# Altium PCB Nixie_Control.PcbDoc
Units mm, origin at the board's own origin, x right, y up, seen from the top; angles counter-clockwise.
Board outline 160 x 45 mm, 4 copper layers (Power, Signal 1, Signal 2, GND), stack 0.603 mm thick; 26 components, 73 nets, 202 pads, 21 vias.
Unrouted connection lines stored in the file: 16.
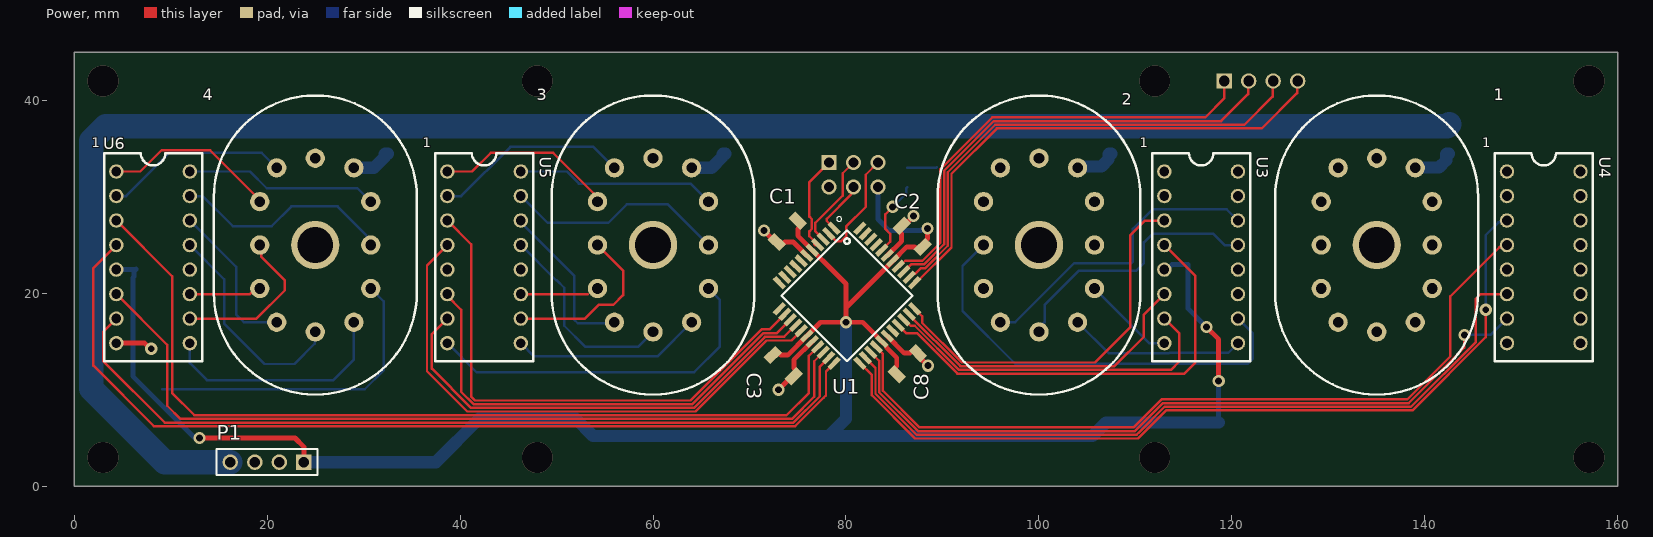
[diagram p0: Power view]
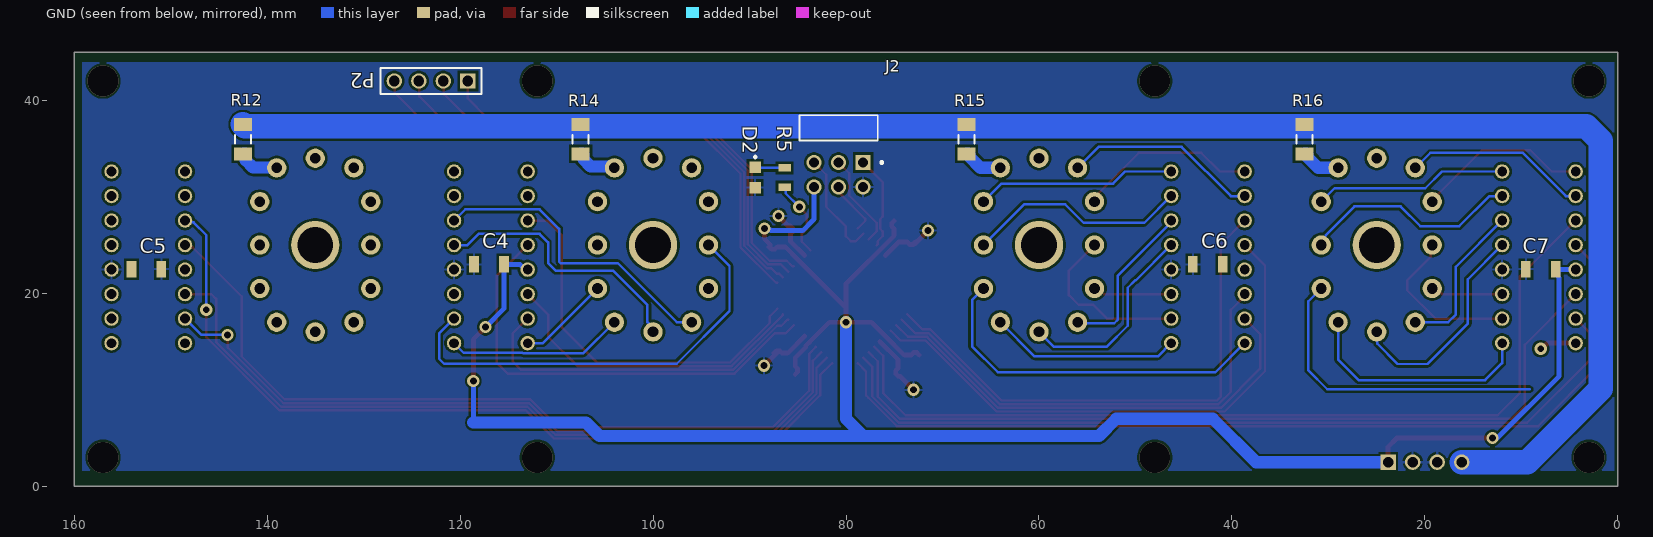
[diagram p1: GND view, seen from below]
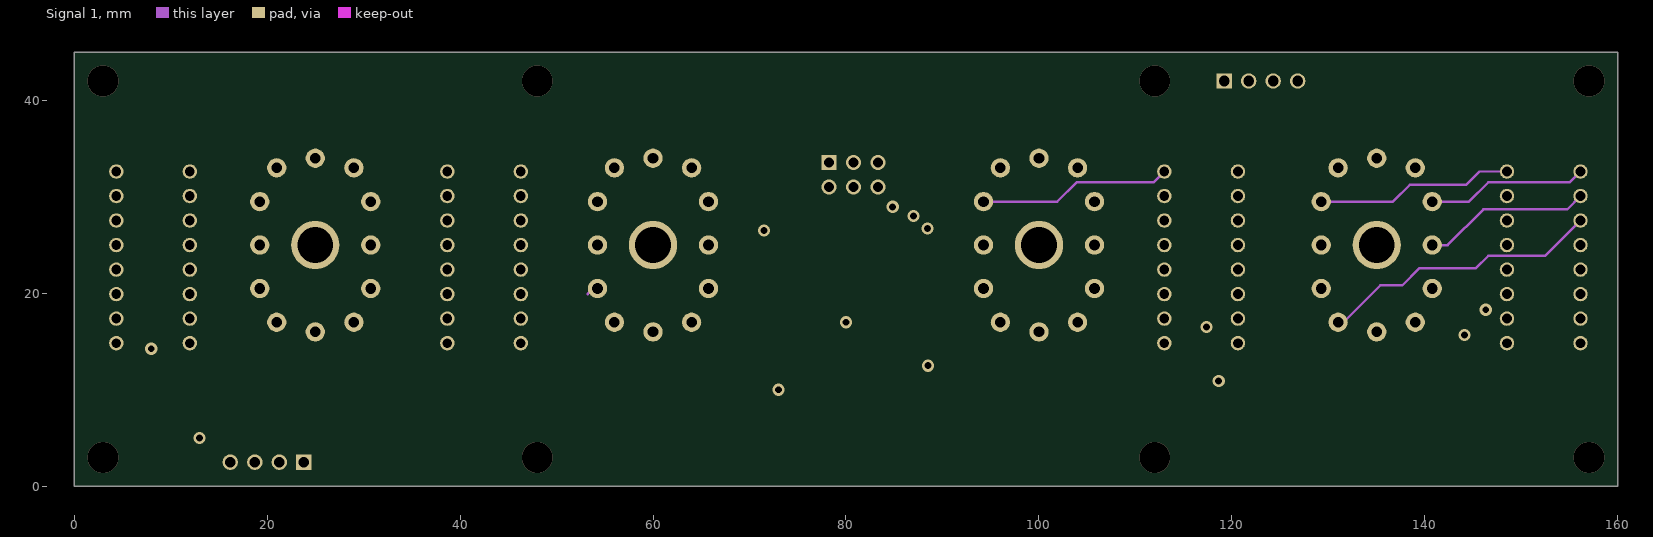
[diagram p2: Signal 1]
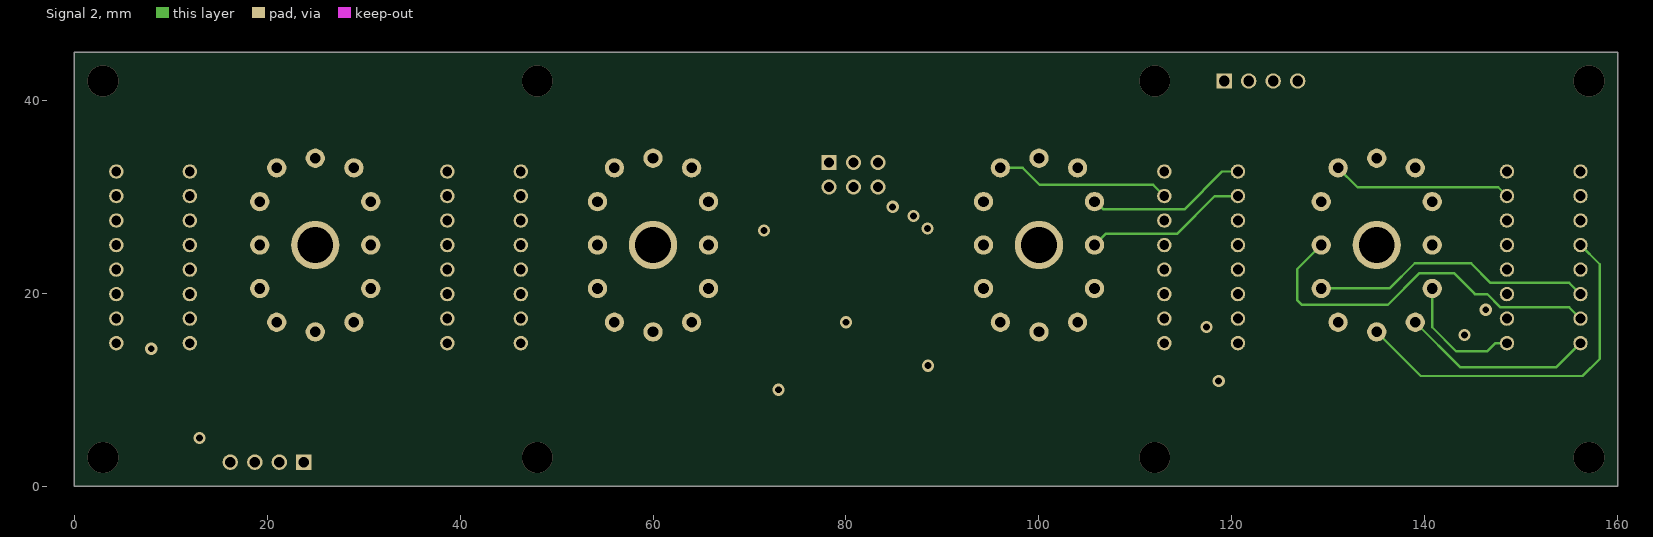
[diagram p3: Signal 2]
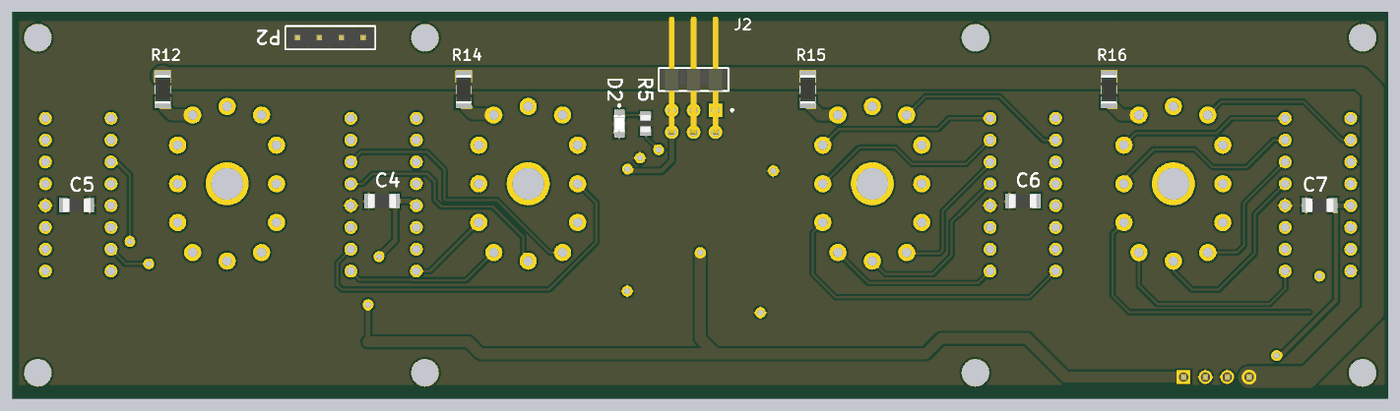
[diagram p4: 3D render of the assembled board from below, using the file's embedded part models]

## Layer stack, top to bottom
Top Solder: solder mask 0.0102, Solder Resist, Dk 3.5
Power: signal copper 0.0356
Dielectric 2: prepreg 0.0711, PP-006, Dk 4.1
Signal 1: signal copper 0.035
Dielectric 1: dielectric 0.32, FR-4, Dk 4.8
Signal 2: signal copper 0.035
Dielectric 3: prepreg 0.0711, PP-006, Dk 4.1
GND: signal copper 0.0356
Bottom Solder: solder mask 0.0102, Solder Resist, Dk 3.5

## Board outline
0,0 160,0 160,45 0,45

## Design rules (kind name [scope] priority, off if disabled: settings)
Clearance [All] p1: gap=0.254 ignorepadtopadclearanceinfootprint=FALSE except(0: Arc-Hole Track-Hole SMDPad-Hole THPad-Hole Via-Hole Fill-Hole Poly-Hole Region-Hole Text-Hole; 0.127: Arc-Arc Arc-Track Track-Track SMDPad-SMDPad; 0.2: Arc-SMDPad Arc-THPad Track-SMDPad Track-THPad; 0.5: THPad-THPad)
Height [All] p1: minheight=0 maxheight=50 prefheight=12.7
HoleSize [All] p1: absolutevalues=TRUE maxlimit=6.3 minlimit=0.2 maxpercent=80.000 minpercent=20.000
PolygonConnect [All] p1: connectstyle=Relief reliefconductorwidth=0.254 reliefentries=4 polygonreliefangle="90 Angle" airgapwidth=0.254
RoutingVias [All] p1: holewidth=0.711 width=1.27 viastyle="Through Hole" minholewidth=0.711 minwidth=1.27 maxholewidth=0.711 maxwidth=1.27
SolderMaskExpansion [All] p1: expansion=0.05 istentingtop=FALSE
Width [All] p1: maxlimit=2.54 minlimit=0.254 preferedwidth=0.254
28 further rules are at their usual default settings.

## Classes and differential pairs
component class ATMega1284p: C1 C2 C3 C8 D2 P2 R5 U1
component class IN_12A: 1 2 3 4 C4 C5 C6 C7 R12 R14 R15 R16 U3 U4 U5 U6
component class Connectors: J2 P1

## Components (designator, comment, footprint, x,y, rotation, side; value= is the part's Value field where it differs from the comment)
1 "IN-12A" IN-12A 135,25 r0 top locked
2 "IN-12A" IN-12A 100,25 r0 top locked
3 "IN-12A" IN-12A 60,25 r0 top locked
4 "IN-12A" IN-12A 25,25 r0 top locked
C1 "Capacitor - 0.1uF - 1206" FOOTPRINT-1206-GEN 73.914,26.416 r45 top value=0.1uF
C2 "Capacitor - 0.1uF - 1206" FOOTPRINT-1206-GEN 86.868,25.908 r315 top value=0.1uF
C3 "Capacitor - 0.1uF - 1206" FOOTPRINT-1206-GEN 73.5,12.5 r135 top value=0.1uF
C4 "Capacitor - 0.1uF - 1206" FOOTPRINT-1206-GEN 117,23 r180 bottom value=0.1uF
C5 "Capacitor - 0.1uF - 1206" FOOTPRINT-1206-GEN 152.5,22.5 r0 bottom value=0.1uF
C6 "Capacitor - 0.1uF - 1206" FOOTPRINT-1206-GEN 42.5,23 r180 bottom value=0.1uF
C7 "Capacitor - 0.1uF - 1206" FOOTPRINT-1206-GEN 8,22.5 r180 bottom value=0.1uF
C8 "Capacitor - 0.1uF - 1206" FOOTPRINT-1206-GEN 86.36,12.7 r225 top value=0.1uF
D2 "LGR971-KN-1" FOOTPRINT-OSRAM-CHIPLED-0805-1A2K 89.408,32.004 r270 bottom
J2 "M20-9950345" FP-M20-9950345-MFG 80.772,37.084 r0 bottom
P1 "61300411121" 61300411121 20,2.5 r180 top
P2 "61300411121" 61300411121 123,42 r0 bottom locked
R5 "RMCF0805FT1K20" FOOTPRINT-0805-GEN 86.36,32.004 r270 bottom value=1.2k
R12 "Resistor 80k +/-1% 1206 250 mW" RESC3216X60X45ML15T20 142.5,35.975 r90 bottom value=80k
R14 "Resistor 80k +/-1% 1206 250 mW" RESC3216X60X45ML15T20 107.5,35.975 r90 bottom value=80k
R15 "Resistor 80k +/-1% 1206 250 mW" RESC3216X60X45ML15T20 67.5,35.975 r90 bottom value=80k
R16 "Resistor 80k +/-1% 1206 250 mW" RESC3216X60X45ML15T20 32.5,35.975 r90 bottom value=80k
U1 "ATMega-1284P" QFP80P1200X1200X120-44N 80.104,19.744 r315 top locked
U3 "K155ID1" Socket_DIP_16 113,32.62 r0 top
U4 "K155ID1" Socket_DIP_16 148.5,32.62 r0 top
U5 "K155ID1" Socket_DIP_16 38.686,32.62 r0 top
U6 "K155ID1" Socket_DIP_16 4.38,32.62 r0 top

## Footprints (in the part's own frame and the unit in brackets; to place one, negate y for a bottom-side part, rotate by r counter-clockwise, add the part's x,y. Pads: shape width x height; smd on the part's side, far side on the other; paste and mask are expansions set on the pad)
61300411121 [mm] "Pin Header, pitch 2.54 mm, THT, Vertical, single row, 4p"
  rect 1.6x1.6 hole 1.1: 1(-3.81,0)
  round 1.6 hole 1.1: 2(-1.27,0) 3(1.27,0) 4(3.81,0)
  silkscreen extent -5.23,-1.35 5.23,1.35, body extent -5.08,-1.27 5.08,1.27, height 8.57
FOOTPRINT-0805-GEN [mm] "1/8 Watt"
  rect 0.8x1.3 smd: 1(-1,0) 2(1,0)
  body extent -1,-0.6 1,0.6, height 0.71
FOOTPRINT-1206-GEN [mm] "1/4 Watt"
  rect 1x1.7 smd: 1(-1.55,0) 2(1.55,0)
  body extent -1.6,-0.8 1.6,0.8, height 0.71
FOOTPRINT-OSRAM-CHIPLED-0805-1A2K [mm] "Rectangle with Flat Top 1.30mm x 1.25mm"
  rect 1.2x1.2 smd: 1(-1.05,0) 2(1.05,0)
  silkscreen extent -2.1,0 -2.1,0, body extent -1.01,-0.62 0.99,0.63, height 0.8
FP-M20-9950345-MFG [mm]
  rect 1.57x1.57 hole 1.02 paste-1000 mask+0: 1(-2.54,3.53)
  round 1.57 hole 1.02 paste-1000 mask+0: 2(-2.54,6.07) 3(0,3.53) 4(0,6.07) 5(2.54,3.53) 6(2.54,6.07)
  silkscreen extent -4.61,-1.37 4.06,3.65, body extent -3.81,-7.37 3.81,6.39, height 5.28
IN-12A [mm]
  round 2 hole 1.1: 1(4,8) 2(5.75,4.5) 3(5.75,0) 4(5.75,-4.5) 5(4,-8) 6(0,-9) 7(-4,-8) 8(-5.75,-4.5) 9(-5.75,0) 10(-5.75,4.5) 11(-4,8) 12(0,9)
  round 5 hole 3.7: ""(0,0)
  silkscreen extent -10.51,-15.49 10.51,15.49, body extent -10,-15.24 10,15.24, height 28
QFP80P1200X1200X120-44N [mm]
  rect 1.5x0.5 smd: 1(-5.9,4) 2(-5.9,3.2) 3(-5.9,2.4) 4(-5.9,1.6) 5(-5.9,0.8) 6(-5.9,0) 7(-5.9,-0.8) 8(-5.9,-1.6) 9(-5.9,-2.4) 10(-5.9,-3.2) 11(-5.9,-4) 23(5.9,-4) 24(5.9,-3.2) 25(5.9,-2.4) 26(5.9,-1.6) 27(5.9,-0.8) 28(5.9,0) 29(5.9,0.8) 30(5.9,1.6) 31(5.9,2.4) 32(5.9,3.2) 33(5.9,4)
  rect 0.5x1.5 smd: 12(-4,-5.9) 13(-3.2,-5.9) 14(-2.4,-5.9) 15(-1.6,-5.9) 16(-0.8,-5.9) 17(0,-5.9) 18(0.8,-5.9) 19(1.6,-5.9) 20(2.4,-5.9) 21(3.2,-5.9) 22(4,-5.9) 34(4,5.9) 35(3.2,5.9) 36(2.4,5.9) 37(1.6,5.9) 38(0.8,5.9) 39(0,5.9) 40(-0.8,5.9) 41(-1.6,5.9) 42(-2.4,5.9) 43(-3.2,5.9) 44(-4,5.9)
  silkscreen extent -6.45,-4.8 4.8,5.3
RESC3216X60X45ML15T20 [mm] "Chip Resistor, 2-Leads, Body 3.3x1.75mm, IPC Low Density"
  rect 1.35x1.85 smd: 1(-1.525,0) 2(1.525,0)
  silkscreen extent -0.45,-0.82 0.45,0.82, body extent -1.65,-0.87 1.65,0.87, height 0.6
Socket_DIP_16 [mm]
  round 1.5 hole 1: 1(0,0) 2(0,-2.54) 3(0,-5.08) 4(0,-7.62) 5(0,-10.16) 6(0,-12.7) 7(0,-15.24) 8(0,-17.78) 9(7.62,-17.78) 10(7.62,-15.24) 11(7.62,-12.7) 12(7.62,-10.16) 13(7.62,-7.62) 14(7.62,-5.08) 15(7.62,-2.54) 16(7.62,0)
  silkscreen extent -1.27,-19.68 8.89,1.91

## Part data
C1 C2 C3 C4 C5 C6 C7 C8: library part CMP-001-00096-1, "CAP CER 0.1UF 50V X7R 1206", Part Number=1276-7034-1-ND, Design Item ID=Capacitor-Generic-1206, LatestRevisionNote="Re-released for DXP Platform.", PackageDescription="Radial Cap, Thru-Hole; 2 Leads; 0.3 in Pin Spacing", PackageReference=RAD-0.3, Published=8-Jun-2000, Publisher="Altium Limited", Source=Generic.SchLib, Type=Capacitor
D2: library part CMP-017-000003-2, "LED Uni-Color Green 572nm 2-Pin Chip 0805(2012Metric) T/R", Current - Maximum=25mA, Current - Test=20mA, Forward Voltage=2.2V, Part Number=475-1410-1-ND, Design Item ID=LED-OSRAM-LG-R971-KN-1, Source=Discrete.SchLib
J2: library part CMP-15831-000002-1, "CONN HEADER R/A 6POS 2.54MM", Current Rating=3A, Manufacturer=Harwin, Package=0, Temperature="-40°C to +105°C", Temperature Range High=+105°C, Temperature Range Low=-40°C, Automotive=No, Category=Conn, ComponentLink2Description=Datasheet, ComponentLink2URL=https://cdn.harwin.com/pdfs/M20-995.pdf, Conn Gender=Male, Conn Orientation="Right Angle", Contact Material=Gold,Nickel, Device Class L1=Connectors, Device Class L2="Headers and Wire Housings", Device Class L3=unset, Digikey Description="CONN HEADER R/A 6POS 2.54MM", Height=5.28mm, Ipc Land Pattern Name=DFN400X400X80-14, Lead Free=Yes, Manufacturer Part Number=M20-9950345, Mouser Description="Headers & Wire Housings 03+03 DIL HORIZONTAL PIN HEADER GOLD HT", Number Of Contacts=6, Number Of Rows=2, Octopart=https://octopart.com/m20-9950345-harwin-21265213, Pitch=2.54mm, RoHS=TRUE
P1 P2: library part CMP-1502-01064-1, "THT Vertical Pin Header WR-PHD, Pitch 2.54 mm, Single Row, 4 pins", Contact Resistance=20mOhm, Manufacturer="Wurth Elektronik", Operating Temperature=-40to105degC, Rated Current=3A, Withstanding Voltage=500VAC, Working Voltage=250VAC, Datasheet URL=https://katalog.we-online.de/em/datasheet/6130xx11121.pdf, Gender=Male, Manufacturer URL=http://www.we-online.de, Mounting Technology=THT, Orientation=Vertical, Package Reference=61300411121, Packaging=Bag, Part Number=61300411121, Pin Number=4, Pitch=2.54mm, Publisher=WurthElektronik, Row Number=Single
R5: library part CMP-009-00185-2, "Res Thick Film 0805 1.2K Ohm 1% 0.125W ±100ppm/°C Molded SMD Paper T/R", Design Item ID=Resistor-Generic-0805-2012, Source=Generic.SchLib, Type=Resistor
R12 R14 R15 R16: library part CMP-009-00016-4, "Chip Resistor, 80 KOhm, +/- 1%, 0.25 W, -55 to 155 degC, 1206 (3216 Metric)", Case/Package=1206, Max Operating Temperature=155°C, Min Operating Temperature=-55°C, Power=250mW, Tolerance=1%, Voltage Rating=200V, Mounting Technology=SM, Pins=2, RoHS Compliant=True

## Via types
v1: diameter 1.27, hole 0.711, Power to GND, 13 vias
v2: diameter 3.2, hole 3.198, Power to GND, 8 vias

## Nets (pads, with @x,y where several pads share a name; then routed paths per layer and width w, separated by ;. In a path a pad name is that pad's centre, name@x,y a point inside that pad or via, vN(x,y) a via of type N, cw(c..) or ccw(c..) an arc to the next point about the centre after c; other vN are vias at no path point)
+5V: C1.2 C2.2 C3.2 C4.2 C5.2 C6.2 C7.2 C8.2 J2.6 P1.1 U1.5 U1.17 U1.27 U1.38 U3.5 U4.5 U5.5 U6.5 | length 218.7
  Power w0.508: v1(13,5) 22.897,5 23.81,4.087 P1.1 ; C3.2 72.651,13.843 72.999,13.843 73.247,13.596 73.956,13.596 U1.17 77.36,17 v1(80,17) ; C1.2 75.257,27.265 75.257,26.917 75.01,26.669 75.01,25.969 80,20.979 80,18.509 ; C8.2 85.017,11.851 85.017,12.199 85.264,12.447 85.264,13.317 84.167,14.414 84.167,14.544 83.71,15.001 83.71,15.012 81.722,17 v1(80,17) ; C2.2@87.888,24.888 87.888,25.084 88.454,25.65 v1(88.454,26.711) ; C2.2 87.717,24.565 87.369,24.565 87.121,24.812 86.303,24.812 U1.38 80,18.509 ; v1(117.348,16.51) 118.618,15.24 v1(118.618,10.922) ; v1(80,17) 80,18.509
  GND w0.508: U6.5 6.41,22.46 C7.2 6.204,22.254 6.204,21.714 6.096,21.606 6.096,11.404 v1@12.5,5 ; J2.6 83.312,27.688 84.5,26.5 87.776,26.5 87.841,26.566 88.308,26.566 v1(88.454,26.711) ; U3.5 113.254,22.46 113.794,23 C4.2 115.45,18.408 v1(117.348,16.51) ; 118.618,6.604 v1(118.618,10.922)
  GND w1.27: P1.1 37.5,2.5 42,7 52,7 53.778,5.222 78.221,5.222 ; v1(80,17) 80,7.001 78.221,5.222 ; 118.618,6.604 106.934,6.604 105.552,5.222 78.221,5.222
GND: C1.1 C2.1 C3.1 C4.1 C5.1 C6.1 C7.1 C8.1 D2.2 J2.2 P1.2 P1.3 U1.6 U1.18 U1.28 U1.39 U3.12 U4.12 U5.12 U6.12 | length 24.7
  Power w0.508: v1(71.5,26.5) C1.1@72.904,25.096 ; C1.1 73.065,25.073 73.413,25.073 73.661,25.32 74.528,25.32 U1.6 ; v1(73,10) 74.404,11.404 C3.1 74.843,11.651 74.843,11.999 74.596,12.247 74.596,13.105 U1.18 ; U1.28 86.052,13.796 86.613,13.796 86.861,14.043 87.209,14.043 C8.1 ; U1.39 85.772,25.412 85.772,26.161 85.525,26.409 85.525,26.757 C2.1 ; C2.1@85.596,26.596 v1(87,28) ; C8.1@87.096,13.904 v1(88.5,12.5)
HV+: P1.4 R12.2 R14.2 R15.2 R16.2 | length 184.6
  GND w2.54: P1.4 9.4,2.5 1.8,10.1 1.8,35.812 3.288,37.3 142.3,37.3 R12.2
Net1_1: 1.1 R12.1 | length 4.5
  GND w1.27: 1.1 139.034,33.034 141.466,33.034 142.21,33.778 142.21,34.41 142.25,34.45 R12.1
Net1_2: 1.2 U4.16 | length 16.7
  Signal 1 w0.254: 1.2 144.562,29.5 146.558,31.496 154.996,31.496 U4.16
Net1_3: 1.3 U4.15 | length 17.5
  Signal 1 w0.254: 1.3 142.348,25 146.05,28.702 154.742,28.702 U4.15
Net1_4: 1.4 U4.8 | length 13.2
  Signal 2 w0.254: 1.4 140.75,16.476 143.246,13.98 146.441,13.98 147.301,14.84 U4.8
Net1_5: 1.5 U4.9 | length 20.1
  Signal 2 w0.254: 1.5 143.681,12.319 153.599,12.319 U4.9
Net1_6: 1.6 U4.13 | length 38.4
  Signal 2 w0.254: 1.6 139.57,11.43 156.337,11.43 158.115,13.208 158.115,23.005 U4.13
Net1_7: 1.7 U4.14 | length 29.5
  Signal 1 w0.254: 1.7 131.554,17 135.382,20.828 137.668,20.828 139.446,22.606 145.288,22.606 146.558,23.876 152.456,23.876 U4.14
Net1_8: 1.8 U4.11 | length 29.3
  Signal 2 w0.254: 1.8 136.324,20.5 138.938,23.114 144.78,23.114 146.812,21.082 154.958,21.082 U4.11
Net1_9: 1.9 U4.10 | length 39.6
  Signal 2 w0.254: 1.9 126.746,22.496 126.746,19.304 127.254,18.796 136.144,18.796 139.446,22.098 143.002,22.098 145.18,19.92 146.45,19.92 147.828,18.542 154.958,18.542 U4.10
Net1_10: 1.10 U4.1 | length 20.5
  Signal 1 w0.254: 1.10 136.688,29.5 138.43,31.242 144.272,31.242 145.65,32.62 U4.1
Net1_11: 1.11 U4.2 | length 18.7
  Signal 2 w0.254: 1.11 133.012,30.988 147.592,30.988 U4.2
Net2_1: 2.1 R14.1 | length 4.4
  GND w1.27: 2.1 104.14,33.14 106.466,33.14 107.21,33.884 107.21,34.41 107.25,34.45 R14.1
Net2_2: 2.2 U3.16 | length 16.8
  Signal 2 w0.254: 2.2 105.897,29.5 106.695,28.702 115.062,28.702 118.98,32.62 U3.16
Net2_3: 2.3 U3.15 | length 17
  Signal 2 w0.254: 2.3 106.912,26.162 114.3,26.162 118.218,30.08 U3.15
Net2_4: 2.4 U3.8 | length 9.6
  GND w0.254: 2.4 111.41,14.84 U3.8
Net2_5: 2.5 U3.9 | length 18.4
  GND w0.254: 2.5 107.237,13.763 113.446,13.763 113.526,13.843 119.623,13.843 U3.9
Net2_6: 2.6 U3.13 | length 27.9
  GND w0.254: 2.6 100,16.438 100.584,17.022 100.584,18.796 104.14,22.352 110.096,22.352 110.873,23.129 110.873,25.275 111.76,26.162 118.072,26.162 119.234,25 U3.13
Net2_7: 2.7 U3.14 | length 31.9
  GND w0.254: 2.7 97.518,17 103.632,23.114 109.579,23.114 109.728,23.263 109.728,26.67 111.76,28.702 119.458,28.702 U3.14
Net2_8: 2.8 U3.11
Net2_9: 2.9 U3.10 | length 45.1
  GND w0.254: 2.9 92.075,22.825 92.075,18.161 97.536,12.7 121.655,12.7 122.174,13.219 122.174,15.826 U3.10
Net2_10: 2.10 U3.1 | length 20
  Signal 1 w0.254: 2.10 101.89,29.5 103.886,31.496 111.876,31.496 U3.1
Net2_11: 2.11 U3.2 | length 18.2
  Signal 2 w0.254: 2.11 98.318,33 100.076,31.242 111.838,31.242 U3.2
Net3_1: 3.1 R15.1 | length 4.2
  GND w1.27: 3.1 66.05,33 67.21,34.16 67.21,34.41 67.25,34.45 R15.1
Net3_2: 3.2 U5.16 | length 20.7
  GND w0.254: U5.16 51.073,32.62 52.324,31.369 63.881,31.369 3.2
Net3_3: 3.3 U5.15 | length 23.1
  GND w0.254: U5.15 49.081,27.305 55.372,27.305 57.277,29.21 61.54,29.21 3.3
Net3_4: 3.4 U5.8 | length 37.1
  GND w0.254: U5.8 41.715,11.811 64.262,11.811 66.929,14.478 66.929,19.321 3.4
Net3_5: 3.5 U5.9 | length 19.7
  GND w0.254: U5.9 47.684,13.462 60.462,13.462 3.5
Net3_6: 3.6 U5.13 | length 21
  GND w0.254: U5.13 49.97,21.336 50.038,21.336 50.8,20.574 50.8,16.637 52.959,14.478 58.478,14.478 3.6
Net3_7: 3.7 U5.14 | length 16.9
  GND w0.254: U5.14 46.306,27.354 51.816,21.844 51.816,17.272 52.197,16.891 55.891,16.891 3.7
Net3_8: 3.8 U5.11 | length 8.2
  Power w0.254: U5.11 53.228,19.92
  Signal 1 w0.254: 53.228,19.92 53.808,20.5 3.8
Net3_9: 3.9 U5.10 | length 17.9
  Power w0.254: U5.10 52.94,17.38 54.356,18.796 55.88,18.796 56.896,19.812 56.896,22.354 3.9
Net3_10: 3.10 U5.1 | length 18.7
  Power w0.254: U5.1 41.256,32.62 43.18,34.544 49.657,34.544 54.25,29.951 3.10
Net3_11: 3.11 U5.2 | length 20.3
  GND w0.254: U5.2 40.113,30.08 45.212,35.179 53.821,35.179 3.11
Net4_1: 4.1 R16.1 | length 4.2
  GND w1.27: 4.1 31.05,33 32.21,34.16 32.21,34.41 32.25,34.45 R16.1
Net4_2: 4.2 U6.16 | length 20
  GND w0.254: U6.16 18.231,32.62 19.964,30.886 29.364,30.886 4.2
Net4_3: 4.3 U6.15 | length 22.9
  GND w0.254: U6.15 13.329,30.08 16.459,26.949 20.472,26.949 22.53,29.007 27.305,29.007 30.308,26.003 30.308,25.914 30.75,25.472 4.3
Net4_4: 4.4 U6.8 | length 36.6
  Power w0.508: U6.8 7.321,14.84 7.907,14.254 v1(8,14.254)
  GND w0.254: 9.162,10.058 30.124,10.058 32.08,12.014 32.08,19.17 4.4
Net4_5: 4.5 U6.9 | length 24.6
  GND w0.254: U6.9 12,12.765 13.767,10.998 26.873,10.998 29,13.125 4.5
Net4_6: 4.6 U6.13 | length 22.9
  GND w0.254: U6.13 15.545,21.455 15.545,16.866 19.736,12.675 22.835,12.675 24.928,14.768 24.928,15.928 4.6
Net4_7: 4.7 U6.14 | length 16.3
  GND w0.254: U6.14 16.789,22.751 16.789,17.805 17.595,17 4.7
Net4_8: 4.8 U6.11 | length 7.5
  Power w0.254: U6.11 18.228,19.92 18.808,20.5 4.8
Net4_9: 4.9 U6.10 | length 17.2
  Power w0.254: U6.10 18.904,17.38 21.844,20.32 21.844,21.336 19.412,23.768 19.412,24.838 4.9
  Signal 1 w0.254: 4.9@19.25,24.63 4.9
Net4_10: 4.10 U6.1 | length 18.1
  Power w0.254: U6.1 6.864,32.62 9.068,34.823 14.097,34.823 19.25,29.67 4.10
Net4_11: 4.11 U6.2 | length 19.1
  GND w0.254: U6.2 5.391,30.08 9.855,34.544 19.456,34.544 4.11
NetD2_1: D2.1 R5.1 | length 3.1
  GND w0.254: R5.1 89.358,33.004 D2.1
NetJ2_1: J2.1 U1.4 | length 9.9
  Power w0.254: U1.4@76.806,24.99 76.708,25.087 76.708,25.4 76.2,25.908 76.2,26.416 76.454,26.67 76.454,27.686 76.2,27.94 76.2,31.522 J2.1
NetJ2_3: J2.3 U1.3 | length 9.9
  Power w0.254: U1.3 76.835,26.407 76.835,27.305 79.66,30.13 79.66,32.442 J2.3
NetJ2_4: J2.4 U1.1 | length 5.7
  Power w0.254: U1.1 78.004,27.501 78.004,27.712 80.52,30.228 80.52,30.762 J2.4
NetJ2_5: J2.5 U1.2 | length 11.4
  Power w0.254: U1.2 78.973,25.4 79.502,25.4 80.01,25.908 80.01,26.924 82.042,28.956 82.042,32.284 J2.5
NetP2_1: P2.1 U1.37 | length 47.3
  Power w0.254: U1.37 85.553,22.785 86.136,23.368 87.919,23.368 89.789,25.238 89.789,32.858 95.158,38.227 117.227,38.227 119.19,40.19 P2.1
NetP2_2: P2.2 U1.36 | length 49.2
  Power w0.254: U1.36 86.741,22.987 88.076,22.987 90.17,25.081 90.17,32.701 95.315,37.846 118.872,37.846 121.666,40.64 P2.2@121.666,42.031
NetP2_3: P2.3 U1.35 | length 51.4
  Power w0.254: U1.35 86.892,22.007 87.158,22.007 87.757,22.606 88.234,22.606 90.551,24.923 90.551,32.543 95.473,37.465 121.285,37.465 124.206,40.386 P2.3@124.206,41.846
NetP2_4: P2.4 U1.34 | length 53.6
  Power w0.254: U1.34 87.255,21.088 90.932,24.765 90.932,32.385 95.631,37.084 123.084,37.084 126.746,40.746 P2.4@126.746,42.144
NetU1_13: U1.13 U5.3 | length 55.7
  Power w0.254: U5.3 41.148,25.078 41.148,9.302 41.56,8.89 63.881,8.89 71.247,16.256 72.091,16.256 U1.13
NetU1_14: U1.14 U5.6 | length 49
  Power w0.254: U5.6 38.686,19.734 40.132,18.288 40.132,9.779 41.402,8.509 64.073,8.509 71.432,15.867 71.493,15.867 71.501,15.875 72.841,15.875 U1.14
NetU1_15: U1.15 U5.7 | length 48.8
  Power w0.254: U5.7 37.084,15.778 37.084,12.192 41.148,8.128 64.231,8.128 71.589,15.486 71.747,15.486 71.755,15.494 73.591,15.494 U1.15
NetU1_16: U1.16 U5.4 | length 57.9
  Power w0.254: U5.4 36.576,22.89 36.576,11.924 40.753,7.747 64.389,7.747 71.747,15.105 74.334,15.105 U1.16
NetU1_19: U1.19 U6.3 | length 93.3
  Power w0.254: U6.3 10.16,21.76 10.16,9.677 12.475,7.362 73.834,7.362 76.149,9.677 76.149,13.526 U1.19
NetU1_20: U1.20 U6.6 | length 87.3
  Power w0.254: U6.6 9.652,14.648 9.652,8.348 11.019,6.981 74.403,6.981 76.708,9.286 76.708,12.954 U1.20
NetU1_21: U1.21 U6.7 | length 87.4
  Power w0.254: U6.7 3,16 3,13 9.4,6.6 74.561,6.6 77.292,9.331 77.292,12.407 U1.21
NetU1_22: U1.22 U6.4 | length 97
  Power w0.254: U6.4 2,22.62 2,12.5 8.281,6.219 74.719,6.219 77.673,9.173 77.927,9.427 77.927,11.91 U1.22
NetU1_23: U1.23 U4.3 | length 87
  Power w0.254: U1.23 82.677,11.514 82.677,9.433 87.157,4.953 110.267,4.953 113.172,7.858 138.699,7.858 146.304,15.463 v1(146.304,18.288)
  GND w0.254: v1(146.304,18.288) 146.304,26.035 147.609,27.34 148.3,27.34 U4.3
NetU1_24: U1.24 U4.6 | length 80
  Power w0.254: U1.24 83.058,12.265 83.058,9.59 87.314,5.334 110.109,5.334 110.363,5.588 113.014,8.239 138.541,8.239 145.272,14.97 145.272,19.415 145.777,19.92 U4.6
NetU1_25: U1.25 U4.7 | length 76.8
  Power w0.254: U1.25 83.439,13.015 83.439,9.748 87.472,5.715 109.951,5.715 110.205,5.969 112.856,8.62 138.318,8.62 144.069,14.371 144.069,15.643 v1(144.107,15.682)
  GND w0.254: v1(144.107,15.682) 146.802,15.682 U4.7
NetU1_26: U1.26 U4.4 | length 82.5
  Power w0.254: U1.26 83.145,14.403 83.82,13.727 83.82,9.906 87.63,6.096 109.793,6.096 110.047,6.35 112.698,9.001 138.16,9.001 142.621,13.462 142.621,19.685 147.698,24.762 148.262,24.762 U4.4
NetU1_30: U1.30 U3.4 | length 46.9
  Power w0.254: U1.30 86.236,15.875 87.345,15.875 91.536,11.684 91.694,11.684 115.062,11.684 116.205,12.827 116.205,21.795 U3.4
NetU1_31: U1.31 U3.7 | length 36.2
  Power w0.254: U1.31 86.07,17.269 86.702,16.637 87.122,16.637 91.694,12.065 92.329,12.065 113.665,12.065 114.554,12.954 114.554,15.826 U3.7
NetU1_32: U1.32 U3.6 | length 33.2
  Power w0.254: U1.32 86.539,17.759 91.852,12.446 92.487,12.446 107.823,12.446 110.871,15.494 110.871,17.791 U3.6
NetU1_33: U1.33 U3.3 | length 40.3
  Power w0.254: U1.33 87.884,17.621 87.884,16.953 92.01,12.827 105.791,12.827 109.474,16.51 109.474,26.035 110.979,27.54 U3.3
Stat_LED: R5.2 U1.40 | length 8
  Power w0.254: U1.40 84.582,25.353 84.582,26.162 84.074,26.67 84.074,28.194 v1(84.836,28.956)
  GND w0.254: v1(84.836,28.956) 86.252,30.372 86.252,30.896 R5.2
pads on no net: 1. 1.12 2. 2.12 3. 3.12 4. 4.12 U1.7 U1.8 U1.9 U1.10 U1.11 U1.12 U1.29 U1.41 U1.42 U1.43 U1.44
copper on no net:
  other v2: 3,3 48,3 112,3 157,3 3,42 48,42 112,42 157,42

## Polygon pours and split planes (outlines as drawn)
GND on GND "GND" (solid, pour order 54): 0.404,1.59 0.404,43.94 159.154,43.94 159.154,1.59

## Text inside footprints (layer, text, board x,y; h text height)
U3: Top Overlay "1" at 110.46,35.16 h1
U4: Top Overlay "1" at 145.96,35.16 h1
U5: Top Overlay "1" at 36.146,35.16 h1
U6: Top Overlay "1" at 1.84,35.16 h1